# EAGLE board loadCell_Amplifier_v0.01 (EAGLE 7.6.0)
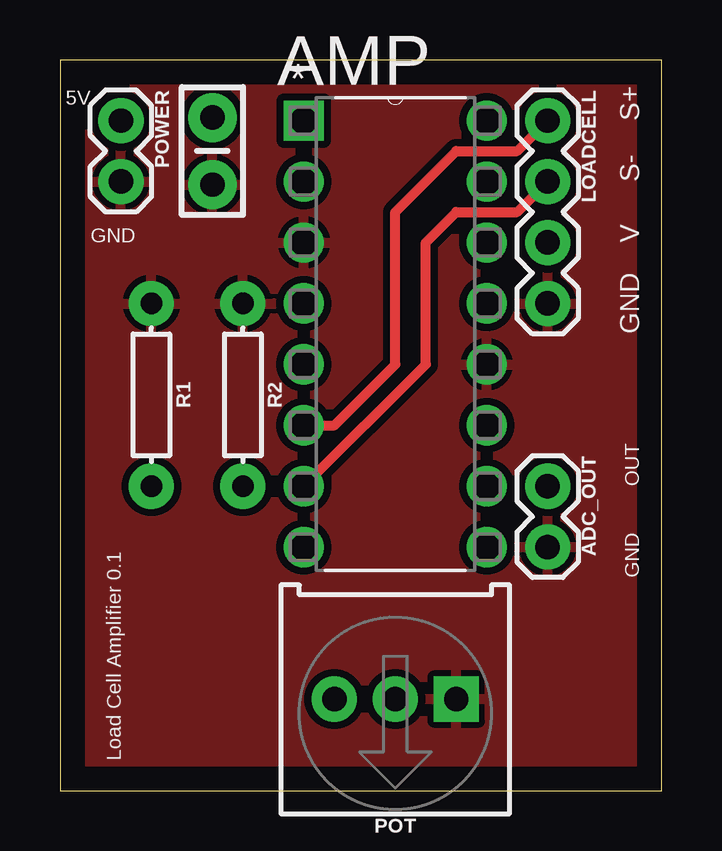
[diagram p0: board, top side]
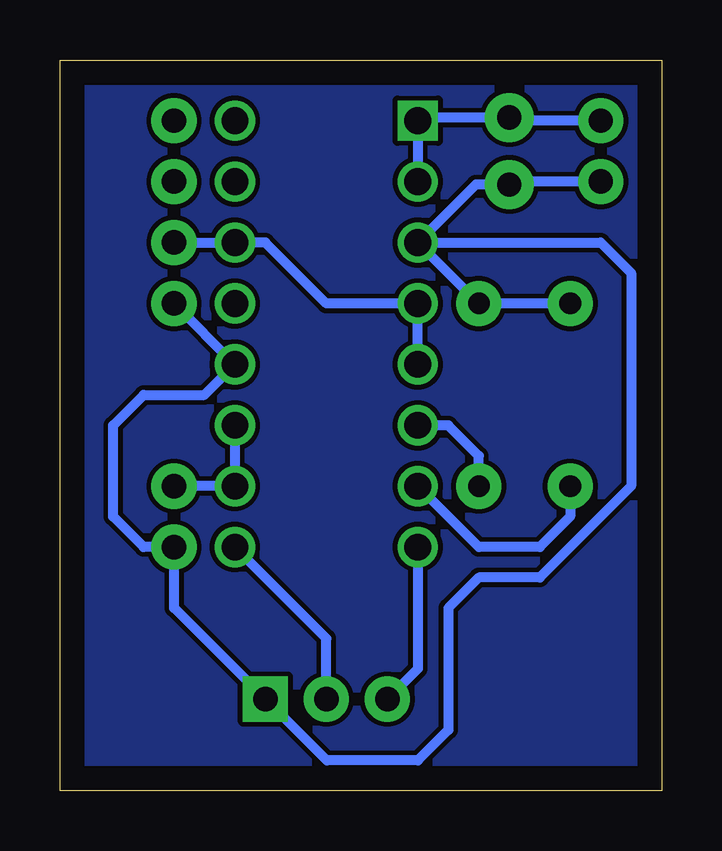
[diagram p1: board, bottom side, seen from below]

Size 25.07 x 30.47 mm. Coordinates in mm from the lower left corner, seen from the top.
Outline: 0,0 25.07,0 25.07,30.47 0,30.47 0,0
Copper layers (1*16): Top 0.035mm / dielectric 1.5mm / Bottom 0.035mm
Design rules "default": minimum track width 10mil, minimum drill 24mil, track to track 8mil, track to pad 8mil, pad to pad 8mil, via to via 8mil, smd to smd 8mil, copper to edge 40mil, drill to drill 8mil, minimum pad ring 10mil, minimum via ring 8mil, stop-mask expansion 4mil, vias tented up to drill 0mil, thermal gap 10mil

## Footprints (pad centres in the part's own frame; a part is rotated, then mirrored left to right if it is on the bottom)
1X02 = drill 1.016 pad 1.88: 1 0,0; 2 2.54,0
DIP254P762X508-16 = drill 1.118 square: 1 -7.62,17.78 | drill 1.118: 2 -7.62,15.24; 3 -7.62,12.7; 4 -7.62,10.16; 5 -7.62,7.62; 6 -7.62,5.08; 7 -7.62,2.54; 8 -7.62,0; 9 0,0; 10 0,2.54; 11 0,5.08; 12 0,7.62; 13 0,10.16; 14 0,12.7; 15 0,15.24; 16 0,17.78
CAP-PTH-SMALL-KIT = drill 1.016 pad 2.032: 1 -1.397,0; 2 1.397,0
1X04 = drill 1.016 pad 1.88: 1 0,0; 2 2.54,0; 3 5.08,0; 4 7.62,0
TRIMPOT-PTH-3386U = drill 1.016 pad 1.88 square: 1 -2.54,-0.015 | drill 1.016 pad 1.88: 2 0,-0.015; 3 2.54,-0.015
AXIAL-0.3 = drill 0.9 pad 1.88: P$1 -3.81,0; P$2 3.81,0

## Placement (x,y rotation side)
ADC_OUT  [1X02]  20.32,12.7 270 top
AMP  INA125P  [DIP254P762X508-16]  17.78,10.16 0 top
C1  0.1uF  [CAP-PTH-SMALL-KIT]  6.35,26.67 270 top
LOADCELL  [1X04]  20.32,27.94 270 top
POT  10k  [TRIMPOT-PTH-3386U]  13.97,3.81 180 top
POWER  [1X02]  2.54,27.94 270 top
R1  10k  [AXIAL-0.3]  3.81,16.51 270 top
R2  10k  [AXIAL-0.3]  7.62,16.51 270 top

## Library data of the parts
ADC_OUT POWER = SparkFun-Connectors
AMP = Texas Instruments_By_element14_Batch_1; MPN: INA125P; OC_FARNELL: 1459461; OC_NEWARK: 35C1726; PACKAGE: PDIP-16; SUPPLIER: Texas Instruments
C1 = SparkFun-Capacitors; PROD_ID: CAP-08370
LOADCELL = SparkFun-Connectors; PROD_ID: CONN-09696
POT = SparkFun-Resistors; PROD_ID: RES-09730; SF_SKU: COM-09806
R1 R2 = SparkFun-Resistors; PROD_ID: RES-12183

## Nets
5V: AMP.1 AMP.2 C1.1 POWER.1
GND: ADC_OUT.2 AMP.3 AMP.12 C1.2 LOADCELL.4 POT.1 POWER.2 R1.P$1 R2.P$1
OUT: ADC_OUT.1 AMP.10 AMP.11
RG: AMP.9 POT.2
RG_2: AMP.8 POT.3
S+: AMP.6 LOADCELL.1 R2.P$2
S-: AMP.7 LOADCELL.2 R1.P$2
V_REF: AMP.4 AMP.5 AMP.14 LOADCELL.3
VREF5: AMP.15
VREF10: AMP.16
VREFBG: AMP.13

## Tracks (layer width: path | path; a pad name or v marks a point on that pad's centre or on a via)
5V
  Bottom 0.406: POWER.1 6.22,27.94 C1.1 10.03,28.07 AMP.1 AMP.2
GND
  Bottom 0.406: POWER.2 6.22,25.4 C1.2 7.75,25.27 AMP.3 | AMP.3 R2.P$1 R1.P$1 | AMP.3 2.54,22.86 1.27,21.59 1.27,12.7 5.08,8.89 7.62,8.89 8.89,7.62 8.89,2.54 10.16,1.27 13.95,1.27 POT.1 16.52,3.82 20.32,7.62 ADC_OUT.2 21.59,10.16 22.86,11.43 22.86,15.24 21.59,16.51 19.05,16.51 AMP.12 LOADCELL.4
  pour Top (isolate 0.305): 0,30.48 24.13,30.48 24.13,0 0,0
N$1
  pour Bottom: 0,30.48 24.13,30.48 24.13,0 0,0
N$2
  pour Bottom: 0,30.48 24.13,30.48 0,0
OUT
  Bottom 0.406: AMP.11 AMP.10 ADC_OUT.1
RG
  Bottom 0.406: POT.2 13.97,6.35 AMP.9
RG_2
  Bottom 0.406: AMP.8 10.16,5.09 POT.3
S+
  Top 0.406: AMP.6 11.43,15.24 13.97,17.78 13.97,24.13 16.51,26.67 19.05,26.67 LOADCELL.1
  Bottom 0.406: R2.P$2 7.62,13.97 8.89,15.24 AMP.6
S-
  Top 0.406: AMP.7 15.24,17.78 15.24,22.86 16.51,24.13 19.05,24.13 LOADCELL.2
  Bottom 0.406: R1.P$2 3.81,11.43 5.08,10.16 7.62,10.16 AMP.7
V_REF
  Bottom 0.406: AMP.5 AMP.4 13.97,20.32 16.51,22.86 AMP.14 LOADCELL.3

## Text on the board
tPlace: 5V | S+ | S- | GND | V | GND | OUT | GND | Load Cell Amplifier 0.1